# Altium PCB Fuse Block - Car Full size (Box-KA11 Masterkit).PcbDoc
Units mm, origin at the board's own origin, x right, y up, seen from the top; angles counter-clockwise.
Board outline 82.5 x 57 mm, 2 copper layers (Top Layer, Bottom Layer); 6 components, 16 nets, 14 pads, 0 vias.
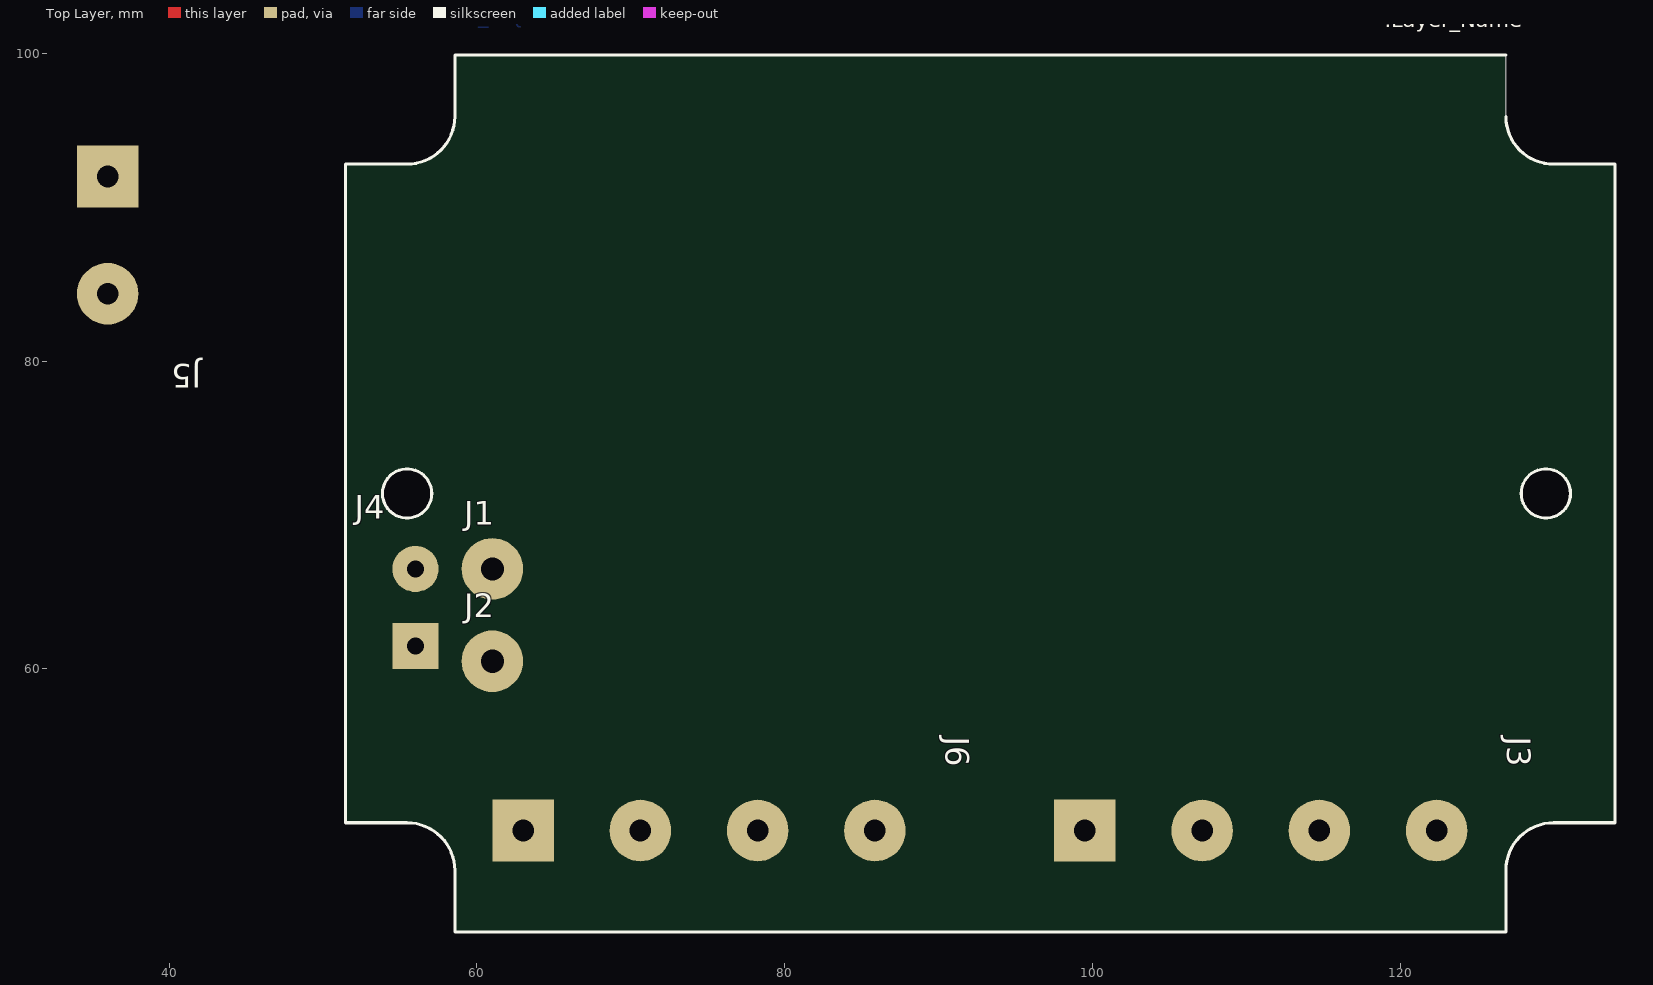
[diagram p0: Top Layer view]
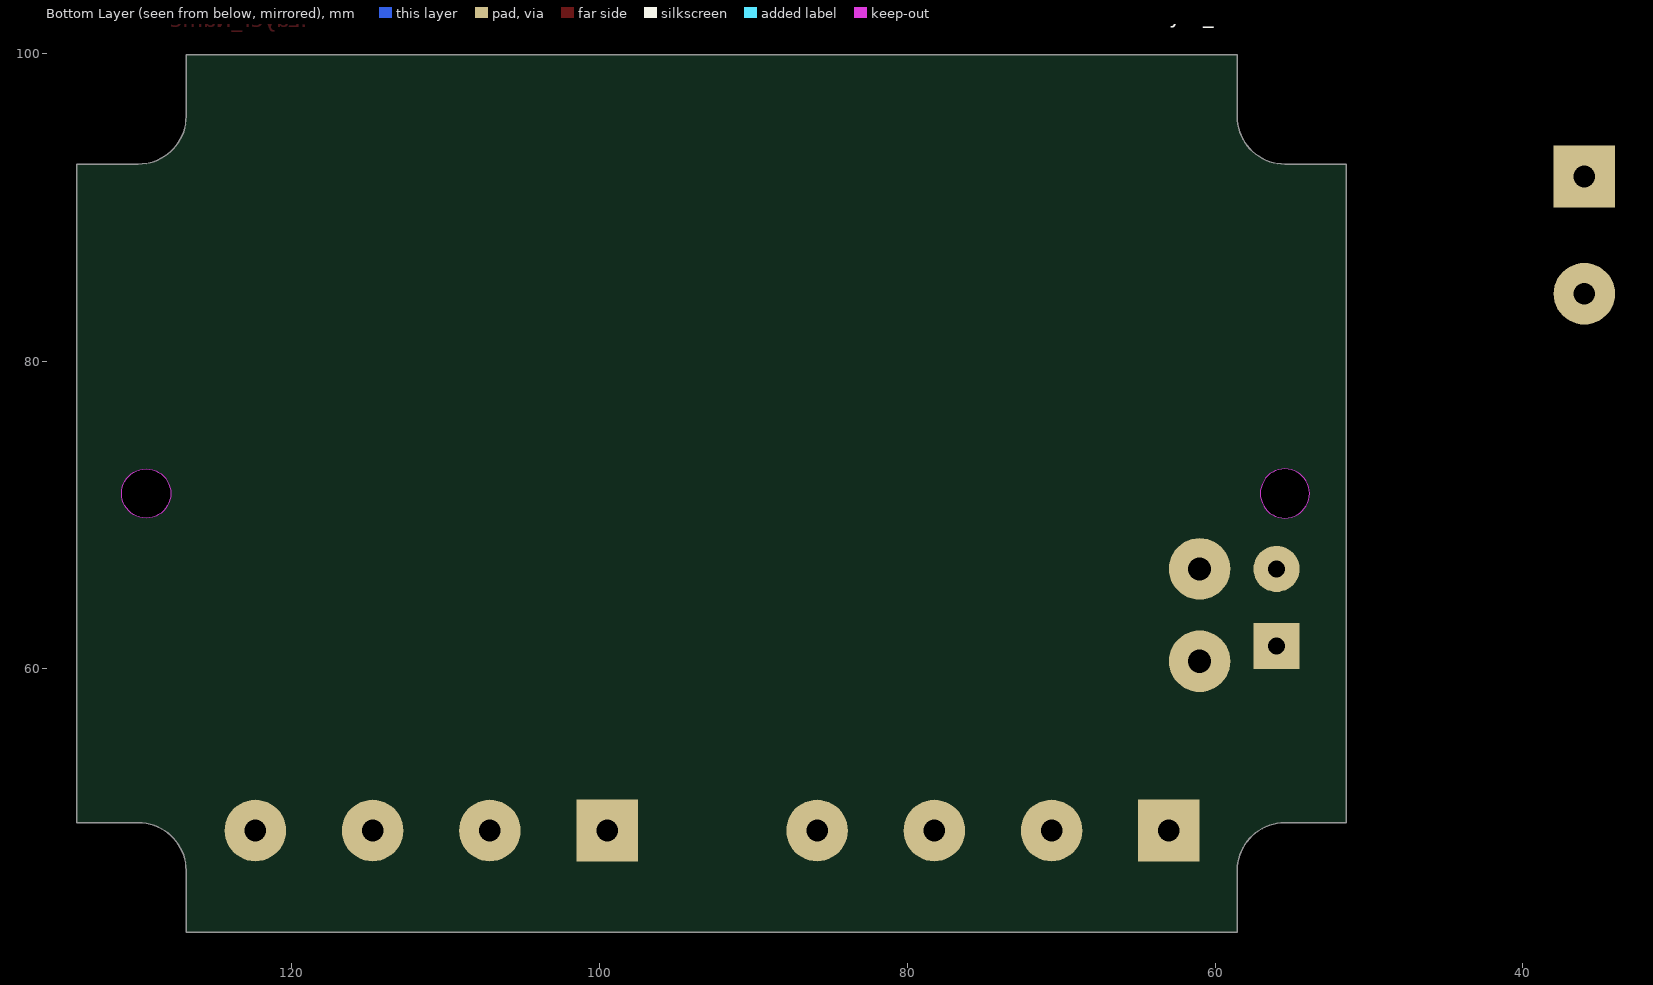
[diagram p1: Bottom Layer view, seen from below]

## Layer stack, top to bottom
Top Solder: solder mask 0.0102, Solder Resist, Dk 3.5
Top Layer: signal copper 0.0356
Dielectric 1: dielectric 0.32, FR-4, Dk 4.8
Bottom Layer: signal copper 0.0356
Bottom Solder: solder mask 0.0102, Solder Resist, Dk 3.5

## Board outline
51.458,50.002 55.458,50.002 cw(c55.458,46.902) 58.558,46.902 58.558,42.902 126.858,42.902 126.858,46.902 cw(c129.958,46.902) 129.958,50.002 133.958,50.002 133.958,92.802 129.958,92.802 cw(c129.958,95.902) 126.858,95.902 126.858,99.902 58.558,99.902 58.558,95.902 cw(c55.458,95.902) 55.458,92.802 51.458,92.802
cut-out: 127.858,71.402 ccw(c129.458,71.402) 129.458,69.802 ccw(c129.458,71.402) 131.058,71.402 ccw(c129.458,71.402) 129.458,73.002 ccw(c129.458,71.402)
cut-out: 55.458,69.802 cw(c55.458,71.402) 53.858,71.402 cw(c55.458,71.402) 55.458,73.002 cw(c55.458,71.402) 57.058,71.402 cw(c55.458,71.402)

## Design rules (kind name [scope] priority, off if disabled: settings)
Clearance [All] p1: gap=0.3
ComponentClearance [All] p1: gap=0 collisioncheckmode=3 verticalgap=0.2 showdistances=FALSE
Height [All] p1: minheight=0 maxheight=25 prefheight=12.7
HoleSize [All] p1: absolutevalues=TRUE maxlimit=3.2 minlimit=0.4 maxpercent=80.000 minpercent=20.000
HoleToHoleClearance [All] p1: gap=0.2 allowstackedmicrovias=TRUE
PlaneClearance [All] p1: clearance=0.5
PlaneConnect [All] p1: planeconnectstyle=Relief reliefexpansion=0.508 reliefentries=4 reliefconductorwidth=0.5 reliefairgap=0.5
PolygonConnect [All] p1: connectstyle=Relief reliefconductorwidth=0.5 reliefentries=4 polygonreliefangle="90 Angle" airgapwidth=0.5
RoutingVias [All] p1: holewidth=0.7 width=1.5 viastyle="Through Hole" minholewidth=0.4 minwidth=0.4 maxholewidth=3.2 maxwidth=7
SilkToSilkClearance [All] p1: silktosilkclearance=0.05
SilkToSolderMaskClearance [IsPad] p1: minsilkscreentomaskgap=0.2 clearancetoexposedcopper=TRUE
SolderMaskExpansion [All] p1: expansion=0.1
Width [All] p1: maxlimit=3 minlimit=0.2 preferedwidth=0.5
21 further rules are at their usual default settings.

## Components (designator, comment, footprint, x,y, rotation, side; value= is the part's Value field where it differs from the comment)
J1 "OnePinC" "OnePin 1.5x4" 61,66.5 r0 top
J2 "OnePinC" "OnePin 1.5x4" 61,60.5 r0 top
J3 "Connector" "TBC 7.62 - 4" 99.5,49.5 r0 top
J4 "Connector" "DG301 5mm 2p" 56,61.5 r90 top
J5 "Connector" "TBC 7.62 - 2" 36,92 r270 top
J6 "Connector" "TBC 7.62 - 4" 63,49.5 r0 top

## Footprints (in the part's own frame and the unit in brackets; to place one, negate y for a bottom-side part, rotate by r counter-clockwise, add the part's x,y. Pads: shape width x height; smd on the part's side, far side on the other; paste and mask are expansions set on the pad)
"DG301 5mm 2p" [mm]
  rect 3x3 hole 1.1: 1(0,0)
  round 3 hole 1.1: 2(5,0)
  body extent -3.1,-3.4 7.5,4.2, height 10
"OnePin 1.5x4" [mm]
  round 4 hole 1.5: 1(0,0)
"TBC 7.62 - 2" [mm] "Terminal Block M3 screw"
  rect 4x4 hole 1.4: 1(0,0)
  round 4 hole 1.4: 2(7.62,0)
  body extent -3.81,-6.15 11.43,6.35, height 12.5
"TBC 7.62 - 4" [mm] "Terminal Block M3 screw"
  rect 4x4 hole 1.4: 1(0,0)
  round 4 hole 1.4: 2(7.62,0) 3(15.24,0) 4(22.86,0)
  body extent -3.81,-6.15 26.67,6.35, height 12.5

## Part data
J1 J2: library part "OnePin Connector", "Only pad"
J3 J6: library part "TBC - 7.62 - 4", "Terminal Block 7.62"
J4: library part DG301-5.0-2P12, "DG301 series"
J5: library part "TBC - 7.62 - 2", "Terminal Block 7.62"

## Nets (pads, with @x,y where several pads share a name; then routed paths per layer and width w, separated by ;. In a path a pad name is that pad's centre, name@x,y a point inside that pad or via, vN(x,y) a via of type N, cw(c..) or ccw(c..) an arc to the next point about the centre after c; other vN are vias at no path point)
NetF1_1: 
NetF1_2: 
NetF2_1: 
NetF2_2: 
NetF3_1: 
NetF3_2: 
NetF4_1: 
NetF4_2: 
NetF5_1: 
NetF5_2: 
NetF6_1: 
NetF6_2: 
NetF7_1: 
NetF7_2: 
NetF8_1: 
NetF8_2: 
pads on no net: J1.1 J2.1 J3.1 J3.2 J3.3 J3.4 J4.1 J4.2 J5.1 J5.2 J6.1 J6.2 J6.3 J6.4

## Other copper
Top Layer:
  text ".Layer_Name" at 118.975,101.7 h1
Bottom Layer:
  text ".Layer_Name" at 65,102 h1

## Silkscreen, mask and mechanical layers (free items; w line width, h text height)
Top Overlay:
  circle w0.2: c129.458,71.402 r1.6
  circle w0.2: c55.458,71.402 r1.6
  lines w0.2: 126.858,95.902 ccw(c129.958,95.902) 129.958,92.802 133.958,92.802 133.958,50.002 129.958,50.002 ccw(c129.958,46.902) 126.858,46.902 126.858,42.902 58.558,42.902 58.558,46.902 ccw(c55.458,46.902) 55.458,50.002 51.458,50.002 51.458,92.802 55.458,92.802 ccw(c55.458,95.902) 58.558,95.902 58.558,99.902 126.858,99.902
  text ".Layer_Name" at 118.975,101.7 h1
  text "A" at 144.5,99 h2
  text "B" at 152.5,99 h2
  text "B1" at 159.5,98 h1.5
  text "B2" at 165.5,98 h1.5
  text "B3" at 171.5,98 h1.5
  text "B4" at 177.5,98 h1.5
  text "A1" at 185.5,98 h1.5
  text "A2" at 191.5,98 h1.5
  text "A3" at 197.5,98 h1.5
  text "A4" at 203.5,98 h1.5
  text "B1" at 143.5,78 h1.5
  text "B2" at 151.5,78 h1.5
  text "B3" at 159.5,78 h1.5
  text "B4" at 166.5,78 h1.5
  text "A1" at 179.5,78 h1.5
  text "A2" at 187.5,78 h1.5
  text "A3" at 194.5,78 h1.5
  text "A4" at 202.5,78 h1.5
Bottom Overlay:
  text ".Layer_Name" at 65,102 h1
Top Solder:
  text ".Layer_Name" at 118.975,101.7 h1
Bottom Solder:
  text ".Layer_Name" at 65,102 h1
Mechanical 2:
  text "82 x 57 mm" at 51,105.25 h1
  text "BOX-KA11 (MasterKit)" at 50.975,103.475 h1
  text ".Pcb_File_Name_No_Path" at 50.925,101.425 h1
Mechanical 3:
  text "82 x 57 mm" at 134,105.25 h1
  text "BOX-KA11 (MasterKit)" at 133.975,103.475 h1
  text ".Pcb_File_Name_No_Path" at 133.925,101.425 h1

## Dimensions
52,43 to 134,43 on Mechanical 2
52,100 to 52,43 on Mechanical 2
52,100 to 52,43 on Mechanical 3
52,43 to 134,43 on Mechanical 3